# Altium PCB PCB2.PcbDoc
Units mm, origin at the board's own origin, x right, y up, seen from the top; angles counter-clockwise.
Board outline 109.8 x 62.5 mm, 2 copper layers (Top Layer, Bottom Layer); 65 components, 73 nets, 275 pads, 0 vias.
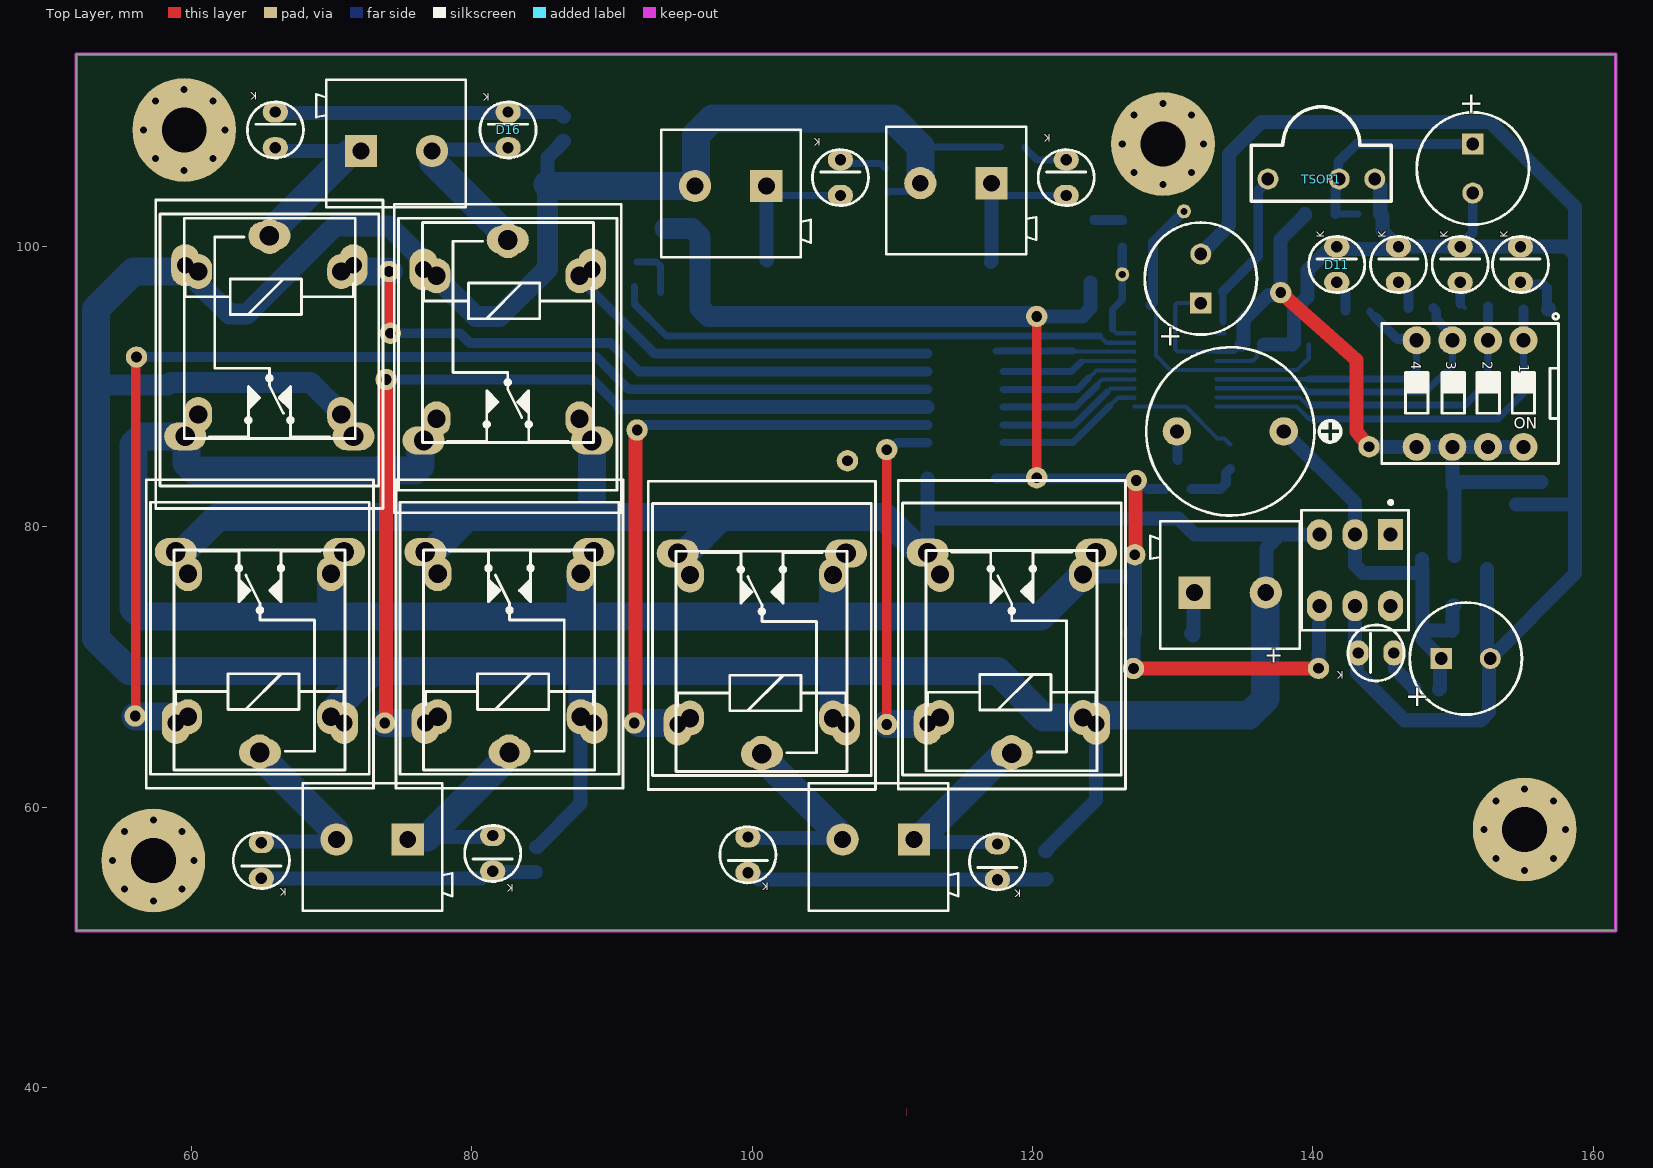
[diagram p0: Top Layer view]
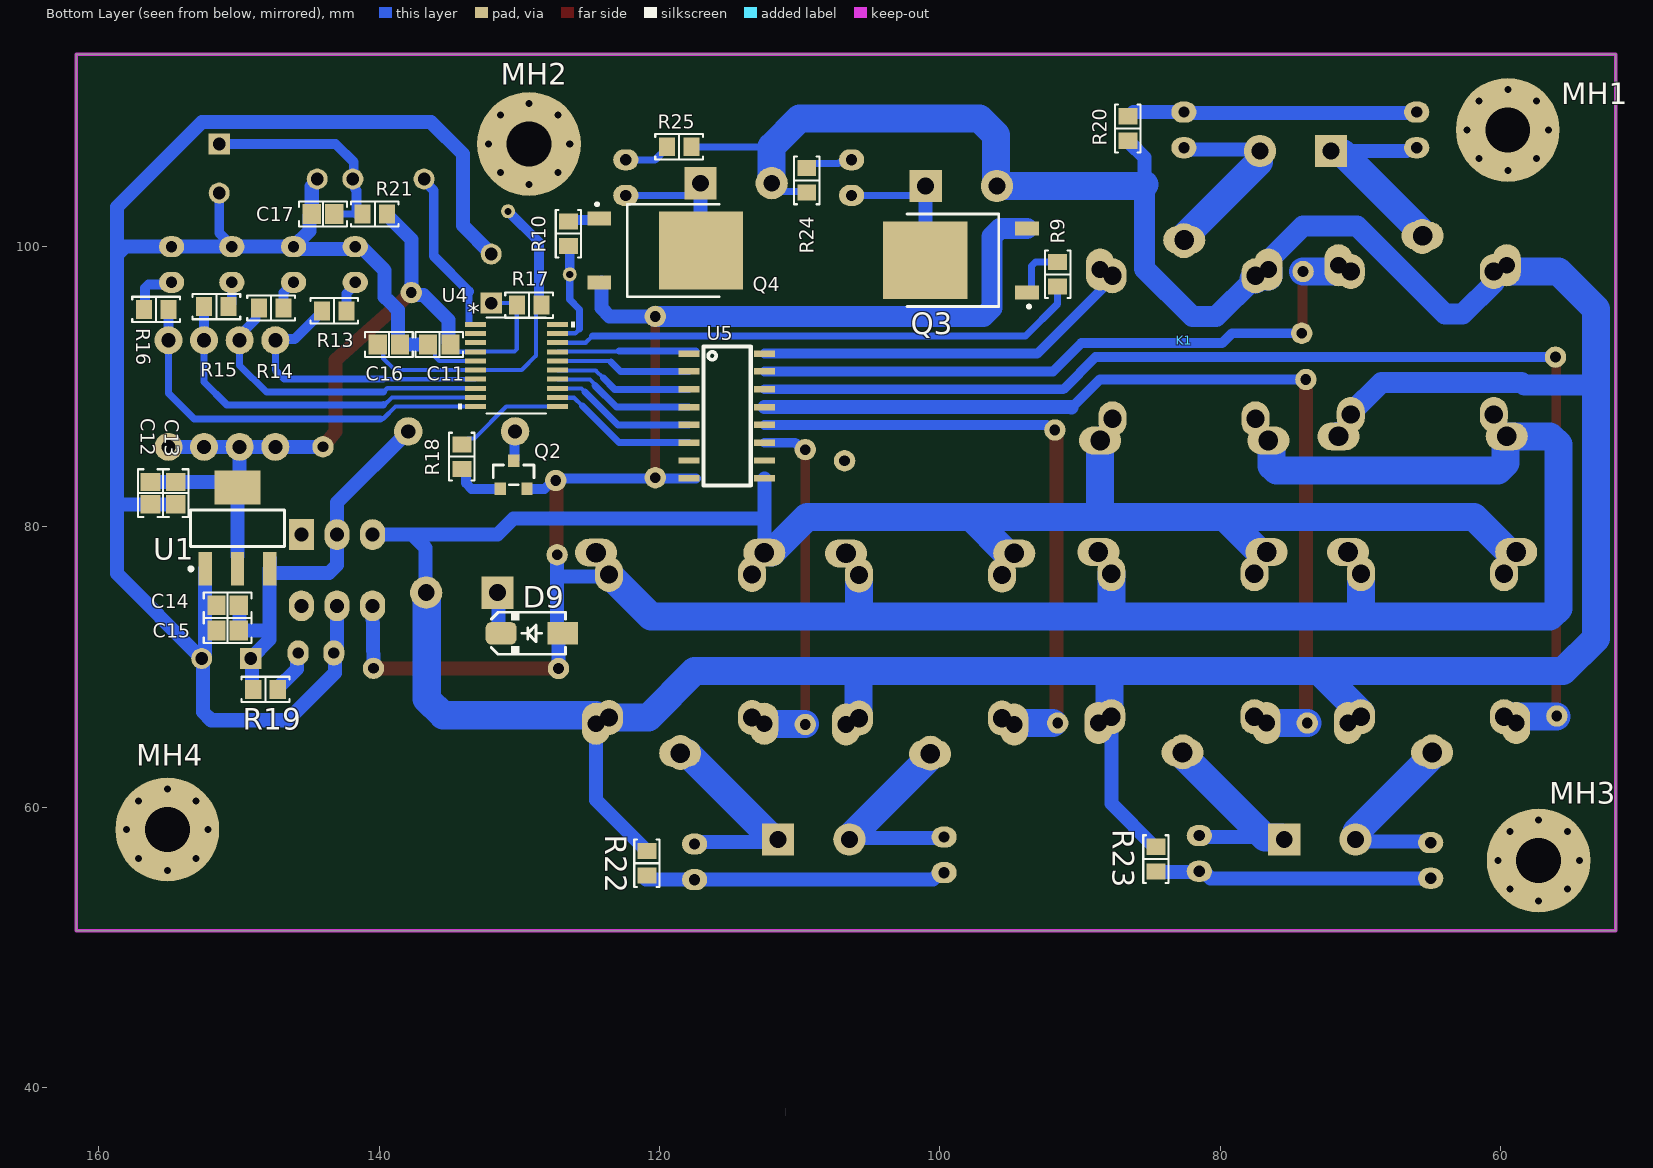
[diagram p1: Bottom Layer view, seen from below]
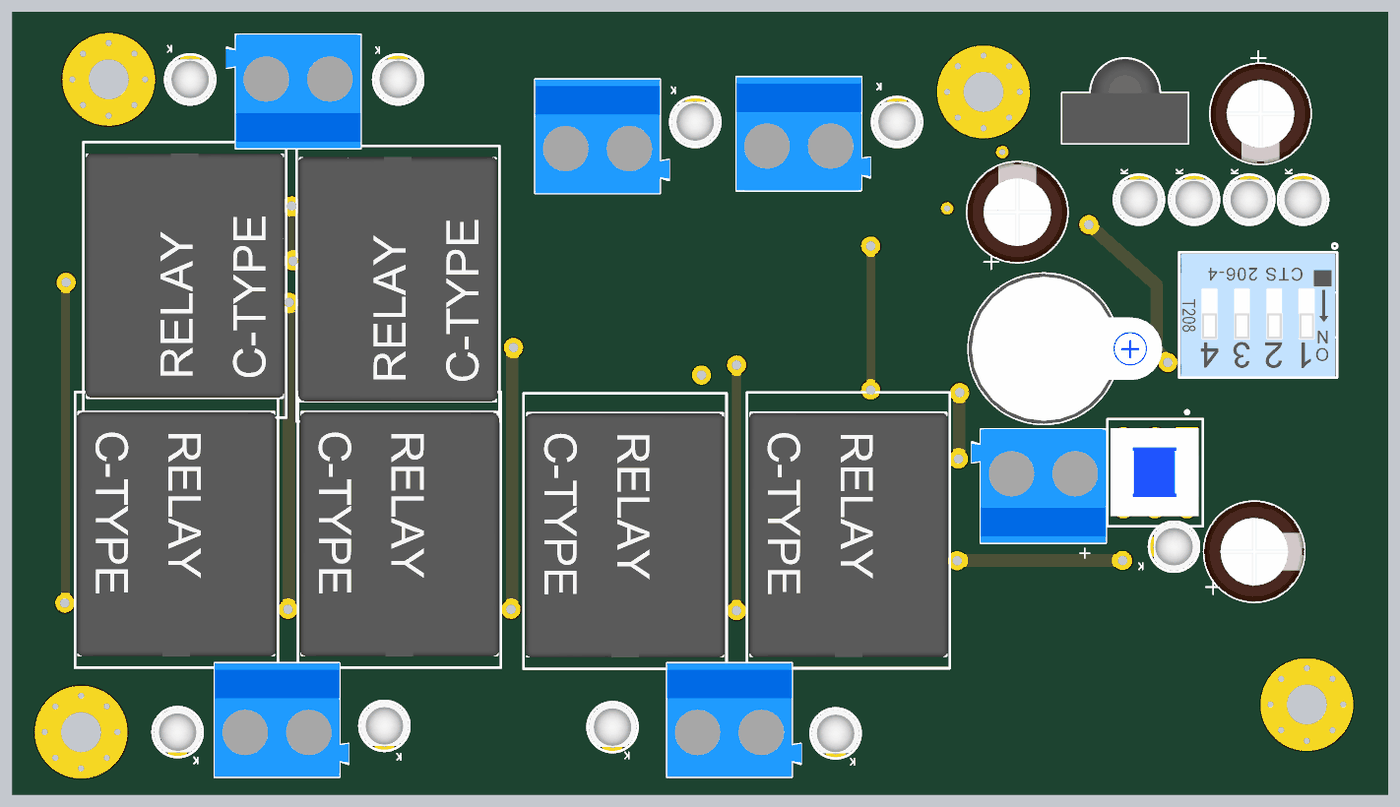
[diagram p2: 3D render of the assembled board from above, using the file's embedded part models]
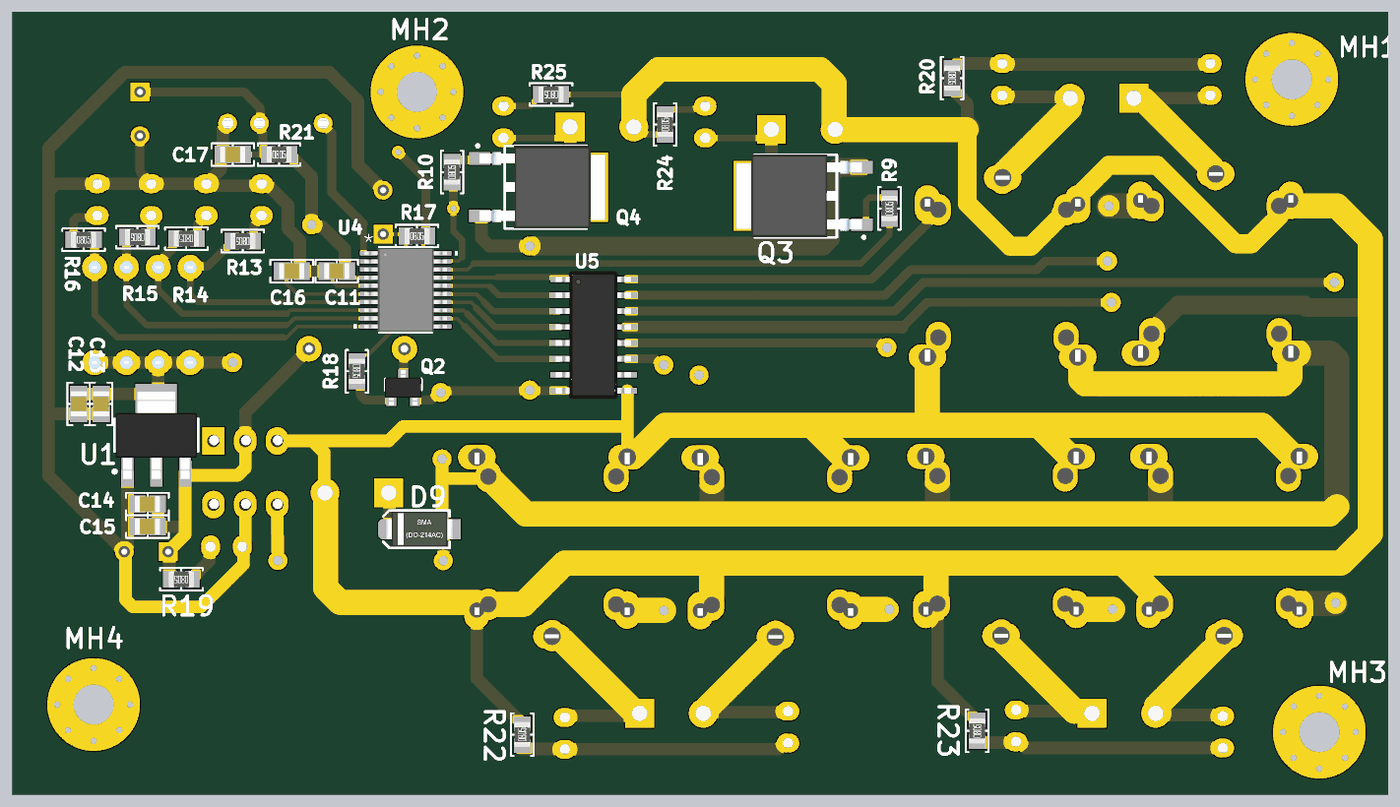
[diagram p3: 3D render of the assembled board from below, using the file's embedded part models]

## Layer stack, top to bottom
Top Solder: solder mask 0.0102, Solder Resist, Dk 3.5
Top Layer: signal copper 0.0356
Dielectric 1: dielectric 0.32, FR-4, Dk 4.8
Bottom Layer: signal copper 0.0356
Bottom Solder: solder mask 0.0102, Solder Resist, Dk 3.5

## Board outline
51.8,51.2 51.8,113.7 161.6,113.7 161.6,51.2

## Design rules (kind name [scope] priority, off if disabled: settings)
Clearance [All] p1: gap=0.3 ignorepadtopadclearanceinfootprint=TRUE except(0.7: Arc-Poly Track-Poly SMDPad-Poly THPad-Poly Via-Poly Fill-Poly Poly-Poly)
PolygonConnect [All] p1: connectstyle=Direct reliefconductorwidth=0.4 reliefentries=4 polygonreliefangle="90 Angle" airgapwidth=0.254
RoutingVias [All] p1: holewidth=0.5 width=1 viastyle="Through Hole" minholewidth=0.5 minwidth=1 maxholewidth=0.7 maxwidth=1.27
SolderMaskExpansion [All] p1: expansion=0.102 istentingtop=FALSE
Width [All] p1: maxlimit=10 minlimit=0.254 preferedwidth=0.3
30 further rules are at their usual default settings.

## Classes and differential pairs
component class Sheet2: C11 C12 C13 C14 C15 C16 C17 D9 MH1 MH2 MH3 MH4 Q2 Q3 Q4 R9 R10 R13 R14 R15 R16 R17 R18 R19 R20 R22 R23 R24 R25 U1 U4 U5

## Components (designator, comment, footprint, x,y, rotation, side; value= is the part's Value field where it differs from the comment)
C3 "Capacitor Electrical THD" Cap_3_(3.5mm) 150.902,70.6 r0 top value=1000uf
C4 "Capacitor Electrical THD" Cap_3_(3.5mm) 132.002,97.7 r90 top value=1000uf
C5 "Capacitor Electrical THD" Cap_3_(3.5mm) 151.402,105.55 r270 top value=470uf
C11 "0.1µF" "CAP 0805_2012" 135.702,93 r180 bottom
C12 "0.1µF" "CAP 0805_2012" 156.302,82.4 r90 bottom
C13 "100µF" "CAP 0805_2012" 154.502,82.4 r90 bottom
C14 "100µF" "CAP 0805_2012" 150.802,74.4 r180 bottom
C15 "0.1µF" "CAP 0805_2012" 150.802,72.6 r180 bottom
C16 "100µF" "CAP 0805_2012" 139.302,93 r0 bottom
C17 "100µF" "CAP 0805_2012" 144.002,102.3 r180 bottom
D9 "1N4007 SMD M7" D_SMA 129.102,72.4 r0 bottom value=1N4007
D11 "LED THD 3mm" "LED THD 3mm (White)" 141.702,98.7 r90 top
D12 "LED THD 3mm" "LED THD 3mm (White)" 146.102,98.7 r90 top
D13 "LED THD 3mm" "LED THD 3mm (White)" 150.502,98.7 r90 top
D14 "LED THD 3mm" "LED THD 3mm (White)" 154.802,98.7 r90 top
D15 "LED THD 3mm" "LED THD 3mm (White)" 144.502,71 r180 top
D16 "LED THD 3mm" "LED THD 3mm (White)" 82.602,108.3 r90 top
D17 "LED THD 3mm" "LED THD 3mm (White)" 99.702,56.6 r270 top
D18 "LED THD 3mm" "LED THD 3mm (White)" 117.502,56.1 r270 top
D19 "LED THD 3mm" "LED THD 3mm (White)" 66.002,108.3 r90 top
D20 "LED THD 3mm" "LED THD 3mm (White)" 65.002,56.2 r270 top
D21 "LED THD 3mm" "LED THD 3mm (White)" 81.502,56.7 r270 top
D22 "LED THD 3mm" "LED THD 3mm (White)" 106.302,104.9 r90 top
D23 "LED THD 3mm" "LED THD 3mm (White)" 122.402,104.9 r90 top
GS1 "Buzzer" BZ_SJ 134.112,86.8 r180 top locked
J2 "Socket Blue 2" "Socket Blue 2" 134.102,75.3 r0 top
J3 "Socket Blue 2" "Socket Blue 2" 74.642,106.8 r0 top
J4 "Socket Blue 2" "Socket Blue 2" 109.002,57.7 r180 top
J5 "Socket Blue 2" "Socket Blue 2" 72.902,57.7 r180 top
J6 "Socket Blue 2" "Socket Blue 2" 98.48,104.3 r180 top
J7 "Socket Blue 2" "Socket Blue 2" 114.54,104.5 r180 top
K1 "RELAY SPST 5 Pin Millon" REL_SPDT_5_2216#1 82.577,98.35 r0 bottom
K2 "RELAY SPST 5 Pin Millon" REL_SPDT_5_2216#2 100.702,65.9 r180 top
K3 "RELAY SPST 5 Pin Millon" REL_SPDT_5_2216#2 64.902,66 r180 top
K4 "RELAY SPST 5 Pin Millon" REL_SPDT_5_2216#2 65.577,98.65 r0 top
K5 "RELAY SPST 5 Pin Millon" REL_SPDT_5_2216#2 118.527,65.95 r180 top
K6 "RELAY SPST 5 Pin Millon" REL_SPDT_5_2216#2 82.702,66 r180 top
MH1 "MH_7.4mmC_3.2mmD" MH_7.4mmC_3.2mmD 59.502,108.3 r180 bottom
MH2 "MH_7.4mmC_3.2mmD" MH_7.4mmC_3.2mmD 129.302,107.3 r180 bottom
MH3 "MH_7.4mmC_3.2mmD" MH_7.4mmC_3.2mmD 57.302,56.2 r180 bottom
MH4 "MH_7.4mmC_3.2mmD" MH_7.4mmC_3.2mmD 155.102,58.4 r180 bottom
Q2 "MMBT2222A-7-F" "DIODES SOT-23-3" 130.402,83.7 r90 bottom
Q3 "PHD45N03LTA" TO228P1000X238-3N 98.502,99 r0 bottom
Q4 "PHD45N03LTA" TO228P1000X238-3N 119.602,99.7 r180 bottom
R9 "100 Ohms" "RES 0805_2012" 91.602,98 r90 bottom
R10 "100 Ohms" "RES 0805_2012" 126.502,100.9 r90 bottom
R13 "50 mOhms" "RES 0805_2012" 143.202,95.4 r0 bottom
R14 "50 mOhms" "RES 0805_2012" 147.702,95.6 r0 bottom
R15 "50 mOhms" "RES 0805_2012" 151.602,95.7 r0 bottom
R16 "50 mOhms" "RES 0805_2012" 155.902,95.5 r180 bottom
R17 "1 kOhms" "RES 0805_2012" 129.302,95.8 r180 bottom
R18 "1 kOhms" "RES 0805_2012" 134.102,85 r270 bottom
R19 "150 Ohms" "RES 0805_2012" 148.102,68.4 r0 bottom
R20 "1 kOhms" "RES 0805_2012" 86.602,108.4 r270 bottom
R21 "100 Ohms" "RES 0805_2012" 140.302,102.3 r180 bottom
R22 "1 kOhms" "RES 0805_2012" 120.902,56 r90 bottom
R23 "1 kOhms" "RES 0805_2012" 84.602,56.3 r90 bottom
R24 "1 kOhms" "RES 0805_2012" 109.502,104.7 r90 bottom
R25 "1 kOhms" "RES 0805_2012" 118.602,107.1 r0 bottom
S12 "Double Switch" SWPUST_DPDT_S2 143.002,76.9 r270 top
S13 "DIP Switch 4" "dip switch 4  Blue THD" 151.212,89.5 r270 top
TSOP1 "TSOP1138" "TSOP11XX & 13XX" 140.602,104.8 r0 top
U1 "AMS1117-3.3" SOT223-4N 150.102,79.9 r90 bottom
U4 "STM32G030F6Px" TSSOP20 130.202,91.5 r180 bottom value=Value
U5 "ULN2003AD" SOIC16 115.202,87.9 r270 bottom

## Footprints (in the part's own frame and the unit in brackets; to place one, negate y for a bottom-side part, rotate by r counter-clockwise, add the part's x,y. Pads: shape width x height; smd on the part's side, far side on the other; paste and mask are expansions set on the pad)
BZ_SJ [mil] "Buzzer From Old SJ Library"
  round 80 hole 40: 1(-150,0) 2(150,0)
  silkscreen extent -310,-236 236,236, body extent -372,-236 236,236, height 380
"CAP 0805_2012" [mm] "Chip Capacitor, 2-Leads, Body 2.00x1.20mm, IPC Medium Density"
  rect 1.3x1.4 smd: 1(-0.8,0) 2(0.8,0)
  silkscreen extent -1.7,-0.9 1.7,0.9, body extent -1,-0.64 1,0.64, height 1.26
Cap_3_(3.5mm) [mm] "Capacitor, Electrolytic, Radial; Body 8 x 5 mm (Dia.xH typ); Pin Spacing 3.5 mm (typ) (www.smartw.ir)"
  rect 1.5x1.51 hole 0.9: 1(-1.75,0)
  round 1.5 hole 0.9: 2(1.75,0)
  silkscreen extent -4,-4 4,4, body extent -4,-4 4,4, height 11
D_SMA [mm] "SMA Molded Diode, 2-Leads, Body 4.3x2.7mm, SOD-128 (www.Smartw.ir)"
  rect 2.2x1.6 smd: 1(-2.2,0)
  rrect50% 2.2x1.6 smd: 2(2.2,0)
  silkscreen extent -2.4,-1.5 2.9,1.5, body extent -2.75,-1.4 2.75,1.4, height 2.6
"DIODES SOT-23-3" [mm] "SOT23, 3-Leads, Body 2.90x2.40mm, Pitch 0.95mm, IPC Medium Density"
  rect 0.9x0.8 smd: 1(-1,0.95) 2(-1,-0.95) 3(1,0)
  silkscreen extent -0.7,-1.45 0.7,1.45, body extent -1.41,-1.45 1.41,1.45, height 1.5
"dip switch 4  Blue THD" [mm] "SWITCH DIP 4POS, THD, 2.54mm, YL04 (www.smartw.ir)"
  round 2 / inner round 1.4 / far side round 2 hole 1: 1(-3.8,3.81) 2(-3.8,1.27) 3(-3.8,-1.27) 4(-3.8,-3.81) 5(3.8,-3.81) 6(3.8,-1.27) 7(3.8,1.27) 8(3.8,3.81)
  silkscreen extent -5.7,-6.3 5,6.31, body extent -4.89,-6.17 4.89,6.17, height 8.14
"LED THD 3mm (White)" [mm] "(www.Smartw.ir)"
  oval 1.5x1.8 hole 0.8: 1(-1.27,0) 2(1.27,0)
  silkscreen extent -2,-2 2,2, body extent -1.9,-1.9 1.6,1.9, height 6.5
MH_7.4mmC_3.2mmD [mm]
  round 7.4 hole 3.2: 1(0,0)
  round 0.8 hole 0.5: 10(-2.9,0) 10(-2.051,-2.051) 10(-2.051,2.051) 10(0,-2.9) 10(0,2.9) 10(2.051,-2.051) 10(2.051,2.051) 10(2.9,0)
REL_SPDT_5_2216#1 [mm] "RELAY SPDT, OMRON G5LE SERIES, 22X16mm and 18.8x15.4mm, HJR-3FF, RAS-1215 (www.Smartw.ir)"
  oval 3x2 hole 1.4: 1(0,-2.1) 2(6,12.2) 3(-6,12.2)
  oval 2x2.5 hole 1.3: 1(0.025,-2.05) 2(5.125,10.65) 3(-5.075,10.65) 4(-5.075,0.45) 5(5.125,0.45)
  oval 2x3 hole 1.2: 4(-6,0) 5(6,0)
  body extent -7.95,-3.75 7.95,15.75, height 15.5
REL_SPDT_5_2216#2 [mm] "RELAY SPDT, OMRON G5LE SERIES, 22X16mm and 18.8x15.4mm, HJR-3FF, RAS-1215 (www.Smartw.ir)"
  oval 3x2 hole 1.4: 1(0,2.1) 2(6,-12.2) 3(-6,-12.2)
  oval 2x2.5 hole 1.3: 1(0.025,2.05) 2(5.125,-10.65) 3(-5.075,-10.65) 4(-5.075,-0.45) 5(5.125,-0.45)
  oval 2x3 hole 1.2: 4(-6,0) 5(6,0)
  silkscreen extent -8.1,-17.35 8.1,4.65, body extent -7.95,-15.75 7.95,3.75, height 15.5
"RES 0805_2012" [mm] "Chip Resistor, 2-Leads, Body 2.00x1.25mm, IPC Medium Density"
  rect 1.15x1.35 smd: 1(-0.875,0) 2(0.875,0)
  silkscreen extent -1.7,-0.9 1.7,0.9, body extent -1,-0.62 1,0.63, height 0.6
"Socket Blue 2" [mm] "(www.Smartw.ir)"
  rect 2.3x2.3 hole 1.2: 1(-2.54,0)
  round 2.3 hole 1.2: 2(2.54,0)
  silkscreen extent -5.71,-4.01 4.95,5.08, body extent -5.78,-3.99 4.96,5.08, height 12.52
SOIC16 [mm] "(www.Smartw.ir)"
  rect 0.46x1.5 smd: 1(-4.445,-2.695) 2(-3.175,-2.695) 3(-1.905,-2.695) 4(-0.635,-2.695) 5(0.635,-2.695) 6(1.905,-2.695) 7(3.175,-2.695) 8(4.445,-2.695) 9(4.445,2.695) 10(3.175,2.695) 11(1.905,2.695) 12(0.635,2.695) 13(-0.635,2.695) 14(-1.905,2.695) 15(-3.175,2.695) 16(-4.445,2.695)
  silkscreen extent -4.95,-1.65 4.95,1.7, body extent -5.09,-3.03 5.11,2.97, height 1.7
SOT223-4N [mm] "SOT223, 4-Leads, Body 6.7x7.3mm (max), Pitch 2.30mm, IPC Medium Density"
  rect 2.4x0.95 smd: 1(-2.9,2.3) 2(-2.9,0) 3(-2.9,-2.3)
  rect 2.4x3.3 smd: 4(2.9,0)
  silkscreen extent -3.02,-3.35 1.3,3.45, body extent -3.48,-3.25 3.48,3.25, height 1.68
SWPUST_DPDT_S2 [mm] "Switch, Push, DPDT, THD, Straight (www.Smartw.ir)"
  rect 2.2x1.8 hole 1: 1(-2.54,2.54)
  oval 2.2x1.8 hole 1: 2(-2.54,0) 3(-2.54,-2.54) 4(2.54,-2.54) 5(2.54,0) 6(2.54,2.54)
  silkscreen extent -4.96,-3.81 4.28,3.81, body extent -3.55,-3.55 3.45,3.45, height 14
TO228P1000X238-3N [mm]
  rect 1.7x1 smd: 1(-4.7,2.285) 3(-4.7,-2.285)
  rect 6x5.55 smd paste-4: 4(2.55,0)
  silkscreen extent -4.96,-3.3 3.85,3.41, body extent -4.7,-3.3 5.3,3.3, height 2.38
"TSOP11XX & 13XX" [mm] "(www.Smartw.ir)"
  round 1.5 hole 0.9: 1(3.81,0) 2(1.27,0) 3(-3.81,0)
  silkscreen extent -5,-1.6 5,5.15, body extent -5,-1.6 5,5.15, height 14.25
TSSOP20 [mil] "STM32 package, TSSOP20, 6.4 x 4.4mm"
  rect 58x14 smd: 1(-115,115.16) 2(-115,89.57) 3(-115,63.98) 4(-115,38.39) 5(-115,12.8) 6(-115,-12.8) 7(-115,-38.39) 8(-115,-63.98) 9(-115,-89.57) 10(-115,-115.16) 11(115,-115.16) 12(115,-89.57) 13(115,-63.98) 14(115,-38.39) 15(115,-12.8) 16(115,12.8) 17(115,38.39) 18(115,63.98) 19(115,89.57) 20(115,115.16)
  silkscreen extent -164,-135 164,135, body extent -130,-130 130,130, height 47

## Part data
C11 C12 C15: library part AC0805KKX8R9BB104, "CAP CER 0805 10% X8R 50V 100NF", Device Package="0805 (2012 Metric)", Manufacturer=Yageo, Operating Temperature="-55°C ~ 150°C", Ratings=AEC-Q200, Supplier Part Number 1=311-4624-1-ND, Temperature Coefficient=X8R, Tolerance=±10%, Voltage - Rated=50V, Applications=Automotive, Capacitance=0.1µF, ComponentLink1Description=Datasheet, ComponentLink1URL=http://www.yageo.com/documents/recent/AC0805KKX8R9BB104.pdf, ComponentLink2Description="DigiKey Link", ComponentLink2URL=http://digikey.com/product-detail/en/yageo/AC0805KKX8R9BB104/311-4624-1-ND/9699550, LastUpdated="2020-09-02 01:04:19.917000", Lifecycle Status=Active, Minimum Order=1, Mounting Type="Surface Mount, MLCC", Package / Case="0805 (2012 Metric)", Packaging=TapeAndReel, Part Number=AC0805KKX8R9BB104, Part Status=Active, PartId=14076, Price=0.06, Series=AC, Size / Dimension="0.079 L x 0.049 W (2.00mm x 1.25mm)", Supplier 1=DigiKey, Thickness (Max)="0.057 (1.45mm)"
C13 C14 C16 C17: library part GRM21BR60J107ME15L, "CAP CER 100UF 6.3V X5R 0805", Device Package="0805 (2012 Metric)", Manufacturer="Murata Electronics", Operating Temperature="-55°C ~ 85°C", Supplier Part Number 1=490-13981-1-ND, Temperature Coefficient=X5R, Tolerance=±20%, Voltage - Rated=6.3V, Applications="General Purpose", Capacitance=100µF, ComponentLink1Description=Datasheet, ComponentLink1URL=https://search.murata.co.jp/Ceramy/image/img/A01X/G101/ENG/GRM21BR60J107ME15-01.pdf, ComponentLink2Description="DigiKey Link", ComponentLink2URL=http://digikey.com/product-detail/en/murata-electronics/GRM21BR60J107ME15L/490-13981-1-ND/6155811, LastUpdated="2020-09-02 01:04:10.617000", Lifecycle Status=Active, Minimum Order=1, Mounting Type="Surface Mount, MLCC", Package / Case="0805 (2012 Metric)", Packaging=TapeAndReel, Part Number=GRM21BR60J107ME15L, Part Status=Active, PartId=16995, Price=0.61, Series=GRM, Size / Dimension="0.079 L x 0.049 W (2.00mm x 1.25mm)", Supplier 1=DigiKey, Thickness (Max)="0.057 (1.45mm)"
D9: "DIODE, GENERAL PURPOSE, 1000V/1A", ComponentLink1Description="Website Smart World", ComponentLink1URL=https://www.smartw.ir/, ComponentLink2Description=Telegram, ComponentLink2URL=https://t.me/altium_smartw, ComponentLink3Description=Instagram, ComponentLink3URL=https://Instagram.com/smartgw.ir, DatasheetVersion=2021
GS1: "Magnetic Transducer Buzzer", Category=MISC, Company="SJ Libraries", ComponentLink1Description=Datasheet, ComponentLink2Description=Reference, Designer="Eng. Saeid Jorablo", HelpURL=http://s3.picofile.com/file/7443264187/Coming_Soon_logo.gif, Mounting Technology="Surface Mount\Through-Hole", PackageDescription="Magnetic Transducer Buzzer", PackageReference=ABSM-1574, Pin Count=0, Publisher="SJ Unlimited", Status=Unreleased
K1 K2 K3 K4 K5 K6: "Relay", ComponentLink1Description="Website Smart World", ComponentLink1URL=https://www.smartw.ir/, ComponentLink2Description=Telegram, ComponentLink2URL=https://t.me/altium_smartw, ComponentLink3Description=Instagram, ComponentLink3URL=https://Instagram.com/smartgw.ir, ComponentLinkp-URL=https://www.smartw.ir/, DatasheetVersion=2021
MH1 MH2 MH3 MH4: "MH_7.4MM Diameter,3.2mm Drill"
Q2: "TRANS NPN 40V 0.6A SMD SOT23-3", Current - Collector (Ic) (Max)=600mA, Current - Collector Cutoff (Max)="10nA (ICBO)", DC Current Gain (hFE) (Min) @ Ic, Vce="100 @ 150mA, 10V", Frequency - Transition=300MHz, Manufacturer="Diodes Incorporated", Operating Temperature="-55°C ~ 150°C (TJ)", Package / Case="TO-236-3, SC-59, SOT-23-3", Power - Max=310mW, Supplier Device Package=SOT-23-3, Supplier Part Number 1=MMBT2222A-FDICT-ND, Voltage - Collector Emitter Breakdown (Max)=40V, ComponentLink1Description=Datasheet, ComponentLink1URL=https://www.diodes.com/assets/Datasheets/ds30041.pdf, ComponentLink2Description="DigiKey Link", ComponentLink2URL=http://digikey.com/product-detail/en/diodes-incorporated/MMBT2222A-7-F/MMBT2222A-FDICT-ND/815723, LastUpdated="2020-09-02 01:30:06.317000", Lifecycle Status=Active, Minimum Order=1, Mounting Type="Surface Mount", Packaging=TapeAndReel, Part Number=MMBT2222A-7-F, Part Status=Active, PartId=84, Price=0.02, Series="Automotive, AEC-Q101", Supplier 1=DigiKey, Transistor Type=NPN, Vce Saturation (Max) @ Ib, Ic="1V @ 50mA, 500mA"
Q3 Q4: "Bipolar Transistors - BJT", Package="TO-252-3 NXP USA", Availability=Unavailable, MF="NXP USA", MP=PHD45N03LTA, Price=None, SnapEDA_Link=https://www.snapeda.com/parts/PHD45N03LTA/NXP%20USA%20Inc./view-part/554376/?ref=snap
R9 R10: library part RCS0805100RFKEA, "RES SMD 100 OHM 1% 0.4W 0805", Device Package="0805 (2012 Metric)", Manufacturer="Vishay Dale", Operating Temperature="-55°C ~ 155°C", Power (Watts)="0.4W, 2/5W", Ratings=AEC-Q200, Supplier Device Package=0805, Supplier Part Number 1=541-2834-1-ND, Temperature Coefficient=±100ppm/°C, Tolerance=±1%, ComponentLink1Description=Datasheet, ComponentLink1URL=http://www.vishay.com/docs/20065/rcse3.pdf, ComponentLink2Description="DigiKey Link", ComponentLink2URL=http://digikey.com/product-detail/en/vishay-dale/RCS0805100RFKEA/541-2834-1-ND/5867127, Composition="Thick Film", Features="Automotive AEC-Q200, Pulse Withstanding", Height - Seated (Max)="0.020 (0.50mm)", LastUpdated="2020-09-02 01:15:23.790000", Lifecycle Status=Active, Minimum Order=1, Number of Terminations=2, Package / Case="0805 (2012 Metric)", Packaging=TapeAndReel, Part Number=RCS0805100RFKEA, Part Status=Active, PartId=27784, Price=0.03, Resistance="100 Ohms", Series="RCS e3", Size / Dimension="0.079 L x 0.049 W (2.00mm x 1.25mm)", Supplier 1=DigiKey
R13 R14 R15 R16: library part CRM0805-FW-R050ELF, "RES 0.05 OHM 1% 1/4W 0805", Device Package="0805 (2012 Metric)", Manufacturer="Bourns Inc.", Operating Temperature="-55°C ~ 155°C", Power (Watts)="0.25W, 1/4W", Supplier Device Package=0805, Supplier Part Number 1=CRM0805-FW-R050ELFCT-ND, Temperature Coefficient=±200ppm/°C, Tolerance=±1%, ComponentLink1Description=Datasheet, ComponentLink1URL=https://www.bourns.com/docs/Product-Datasheets/CRM0805_1206_2010.pdf, ComponentLink2Description="DigiKey Link", ComponentLink2URL=http://digikey.com/product-detail/en/bourns-inc/CRM0805-FW-R050ELF/CRM0805-FW-R050ELFCT-ND/3592903, Composition="Thick Film", Features="Current Sense", Height - Seated (Max)="0.024 (0.60mm)", LastUpdated="2020-09-02 01:15:22.390000", Lifecycle Status=Active, Minimum Order=1, Number of Terminations=2, Package / Case="0805 (2012 Metric)", Packaging=TapeAndReel, Part Number=CRM0805-FW-R050ELF, Part Status=Active, PartId=28469, Price=0.14, Resistance="50 mOhms", Series=CRM0805, Size / Dimension="0.079 L x 0.047 W (2.00mm x 1.20mm)", Supplier 1=DigiKey
R17 R18 R20 R22 R23 R24 R25: library part RNCP0805FTD1K00, "RES 1K OHM 1% 1/4W 0805", Device Package="0805 (2012 Metric)", Manufacturer="Stackpole Electronics Inc", Operating Temperature="-55°C ~ 155°C", Power (Watts)="0.25W, 1/4W", Supplier Device Package=0805, Supplier Part Number 1=RNCP0805FTD1K00CT-ND, Temperature Coefficient=±100ppm/°C, Tolerance=±1%, ComponentLink1Description=Datasheet, ComponentLink1URL=https://www.seielect.com/catalog/sei-rncp.pdf, ComponentLink2Description="DigiKey Link", ComponentLink2URL=http://digikey.com/product-detail/en/stackpole-electronics-inc/RNCP0805FTD1K00/RNCP0805FTD1K00CT-ND/2240568, Composition="Thin Film", Features="Anti-Sulfur, Moisture Resistant", Height - Seated (Max)="0.024 (0.60mm)", LastUpdated="2020-09-02 01:15:23.347000", Lifecycle Status=Active, Minimum Order=1, Number of Terminations=2, Package / Case="0805 (2012 Metric)", Packaging=TapeAndReel, Part Number=RNCP0805FTD1K00, Part Status=Active, PartId=28023, Price=0.01, Resistance="1 kOhms", Series=RNCP, Size / Dimension="0.079 L x 0.049 W (2.00mm x 1.25mm)", Supplier 1=DigiKey
R19: library part CRGP0805F150R, "CRGP 0805 150R 1%", Device Package="0805 (2012 Metric)", Manufacturer="TE Connectivity Passive Product", Operating Temperature="-55°C ~ 155°C", Power (Watts)="0.333W, 1/3W", Supplier Device Package=0805, Supplier Part Number 1=A130467CT-ND, Temperature Coefficient=±100ppm/°C, Tolerance=±1%, ComponentLink1Description=Datasheet, ComponentLink1URL=https://www.te.com/commerce/DocumentDelivery/DDEController?Action=srchrtrv&DocNm=9-1773463-9&DocType=DS&DocLang=English, ComponentLink2Description="DigiKey Link", ComponentLink2URL=http://digikey.com/product-detail/en/te-connectivity-passive-product/CRGP0805F150R/A130467CT-ND/8578299, Composition="Thick Film", Features="Pulse Withstanding", Height - Seated (Max)="0.026 (0.65mm)", LastUpdated="2020-09-02 01:15:21.910000", Lifecycle Status=Active, Minimum Order=1, Number of Terminations=2, Package / Case="0805 (2012 Metric)", Packaging=TapeAndReel, Part Number=CRGP0805F150R, Part Status=Active, PartId=28713, Price=0.02, Resistance="150 Ohms", Series=CRGP, Size / Dimension="0.079 L x 0.049 W (2.00mm x 1.25mm)", Supplier 1=DigiKey
R21: library part CRGP0805F100R, "CRGP 0805 100R 1%", Device Package="0805 (2012 Metric)", Manufacturer="TE Connectivity Passive Product", Operating Temperature="-55°C ~ 155°C", Power (Watts)="0.333W, 1/3W", Supplier Device Package=0805, Supplier Part Number 1=A130465CT-ND, Temperature Coefficient=±200ppm/°C, Tolerance=±1%, ComponentLink1Description=Datasheet, ComponentLink1URL=https://www.te.com/commerce/DocumentDelivery/DDEController?Action=srchrtrv&DocNm=9-1773463-9&DocType=DS&DocLang=English, ComponentLink2Description="DigiKey Link", ComponentLink2URL=http://digikey.com/product-detail/en/te-connectivity-passive-product/CRGP0805F100R/A130465CT-ND/8578297, Composition="Thick Film", Features="Pulse Withstanding", Height - Seated (Max)="0.026 (0.65mm)", LastUpdated="2020-09-02 01:14:53.183000", Lifecycle Status=Active, Minimum Order=1, Number of Terminations=2, Package / Case="0805 (2012 Metric)", Packaging=TapeAndReel, Part Number=CRGP0805F100R, Part Status=Active, PartId=41705, Price=0.02, Resistance="100 Ohms", Series=CRGP, Size / Dimension="0.079 L x 0.049 W (2.00mm x 1.25mm)", Supplier 1=DigiKey
S12: library part "SW DPDT", "DPDT Switch", ComponentLink1Description="Website Smart World", ComponentLink1URL=https://www.smartw.ir/, ComponentLink2Description=Telegram, ComponentLink2URL=https://t.me/altium_smartw, ComponentLink3Description=Instagram, ComponentLink3URL=https://Instagram.com/smartgw.ir, DatasheetVersion=2021
S13: "4 BIT DIP Switch", ComponentLink1Description="Website Smart World", ComponentLink1URL=https://www.smartw.ir/, ComponentLink2Description=Telegram, ComponentLink2URL=https://t.me/altium_smartw, ComponentLink3Description=Instagram, ComponentLink3URL=https://Instagram.com/smartgw.ir, DatasheetVersion=2021
TSOP1: "IR Receiver Modules for Remote Control Systems", ComponentLink1Description="Website Smart World", ComponentLink1URL=https://www.smartw.ir/, ComponentLink2Description=Telegram, ComponentLink2URL=https://t.me/altium_smartw, ComponentLink3Description=Instagram, ComponentLink3URL=https://Instagram.com/smartgw.ir, ComponentLinkp-URL=https://www.smartw.ir/, DatasheetVersion=2021
U1: library part CMP-209535-000001-1, "LDO Voltage Regulators 1A, 3.3V", Dropout Voltage=1.1V, Manufacturer="Advanced Monolithic Systems", Max Junction Temp=+125°C, Max Power Dissipation=1.2W, Max Supply Voltage=15V, Nominal Supply Current=5mA, Output Current=1A, Output Voltage=3.3V, Package=AMS1117, Temperature="-40°C to +125°C", Temperature Range Low=-40°C, Automotive=No, Category=IC, ComponentLink2Description=Datasheet, ComponentLink2URL=http://www.advanced-monolithic.com/pdf/ds1117.pdf, Device Class L1="Integrated Circuits (ICs)", Device Class L2="Power Management ICs", Device Class L3="Voltage Regulators - Linear", Height=1.8mm, Ipc Land Pattern Name=SOT229P700X180-4, Lead Free=Yes, Manufacturer Part Number=AMS1117-3.3, Number Of Outputs=1, Octopart=https://octopart.com/ams1117-3.3-advanced+monolithic+systems-25899300, Output Type=Fixed, RoHS=TRUE, Standoff Height=0.64mm, Temperature Range High=+125°C
U4: "The STM32G030x6/x8 mainstream microcontrollers are based on high-performance Arm® Cortex®-M0+ 32-bit RISC core operating at up to 64 MHz frequency.  / 32K Flash and 8K RAM with 20pin TSSOP 6.4x4.4mm package", Manufacturer_Part_Number=stm32g0_tssop20_t1, Copyright="Copyright (C) 2018 Accelerated Designs. All rights reserved", RefDes=RefDes, TYPE=DEV, Vendor=STMicroelectronics
U5: "Darlington Transistor Array", Code_IPC=SOIC127P600-16, ComponentLink1Description="Manufacturer Link", ComponentLink1URL=http://www.ti.com/, ComponentLink2Description=Datasheet, ComponentLink2URL=http://www-s.ti.com/sc/ds/uln2002a.pdf, DatasheetVersion=Sep-1986, LatestRevisionDate=13-Apr-2006, LatestRevisionNote="IPC-7351 Footprint Added.", PackageDescription="16-Pin Small Outline Integrated Circuit 1.27 mm Pitch", PackageReference=D016, PackageVersion=Jan-1998, Published=15-May-2002, Publisher="Altium Limited"
C3 C4 C5 D11 D12 D13 D14 D15 D16 D17 D18 D19 D20 D21 D22 D23: ComponentLink1Description="Website Smart World", ComponentLink1URL=https://www.smartw.ir/, ComponentLink2Description=Telegram, ComponentLink2URL=https://t.me/altium_smartw, ComponentLink3Description=Instagram, ComponentLink3URL=https://Instagram.com/smartgw.ir, DatasheetVersion=2021
J2 J3 J4 J5 J6 J7: ComponentLink1Description="Website Smart World", ComponentLink1URL=https://www.smartw.ir/*, ComponentLink2Description=Telegram, ComponentLink2URL=https://t.me/altium_smartw, ComponentLink3Description=Instagram, ComponentLink3URL=https://Instagram.com/smartgw.ir, DatasheetVersion=2021

## Free pads (board coordinates)
  round 1.524 hole 0.762: 2(127.302,78) 3(120.302,83.5) 4(144.002,85.7) 5(137.702,96.7) 9(109.602,65.9) 10(109.602,85.5) 11(91.802,86.9) 13(91.602,66) 14(73.802,66) 15(56.102,92.1) 16(56.002,66.5) 17(73.902,90.5) 18(74.2,93.8) 19(74.102,98.2) 20(120.302,95) 21(127.402,83.3) 22(106.802,84.7) 24(127.202,69.886) 25(140.402,69.9)
  round 1 hole 0.5: 6(126.402,98) 8(130.802,102.5)

## Nets (pads, with @x,y where several pads share a name; then routed paths per layer and width w, separated by ;. In a path a pad name is that pad's centre, name@x,y a point inside that pad or via, vN(x,y) a via of type N, cw(c..) or ccw(c..) an arc to the next point about the centre after c; other vN are vias at no path point)
+Power: J2.2 J6.2 J7.2 K1.2 K1.4 K2.2 K2.4 K3.2 K3.4 K4.2 K4.4 K5.2 K5.4 K6.2 K6.4 R20.2 R22.2 R23.2 R24.1 R25.1 S12.3 U5.9 | length 370.1
  Bottom Layer w0.5: R24.1@109.702,103.825 109.777,103.9 111.553,103.9 J7.2@112.153,104.5 ; 111.902,107.1 112,107.1 R25.1
  Bottom Layer w1: K3.2@58.902,78.2 K3.2@59.402,78.2 ; K3.4@69.977,66.45 K3.4@69.977,66.7 ; K4.2@71.677,86.95 K4.2@71.702,86.975 ; K6.2@76.702,78.2 K6.2@77.202,78.2 ; R23.2 84.702,57.175 87.777,60.25 87.777,66.45 87.777,66.7 K6.4@87.902,66.825 ; 85.4,104.4 85.4,106.323 86.427,107.35 86.427,107.45 86.502,107.525 R20.2 ; K1.2@87.702,87.45 87.702,87.7 K1.2@87.702,87.95 ; 88.502,80.7 88.577,80.775 ; K2.2@94.702,78.1 K2.2@95.202,78.1 ; K2.4@105.777,66.35 K2.4@105.802,66.375 ; K5.2@112.027,78.15 112.527,78.15 112.517,78.16 112.517,80.6 ; U5.9 112.517,83.445 112.517,80.6 ; R22.2 121.002,56.875 121.077,56.95 121.077,57.05 124.527,60.5 K5.4@124.527,65.95 ; K5.4@123.602,66.4 K5.4@123.602,66.557 ; J2.2@136.602,75.26 136.702,75.36 136.702,78.5 137.642,79.44 ; S12.3 137.642,79.44 ; 112.517,80.6 130.402,80.6 131.562,79.44 137.642,79.44
  Bottom Layer w1.5: 53.227,90.1 58.327,90.1 58.527,90.3 68.516,90.3 70.702,88.115 K4.2@70.702,88 ; K4.4@60.502,97.95 60.502,97.4 62.729,95.172 63.972,95.172 70.25,101.45 74.104,101.45 K1.4@76.402,99.153 ; K1.4@77.65,97.65 80.322,94.978 81.978,94.978 85.4,98.4 85.4,104.4
  Bottom Layer w2: K3.2@59.402,78.2 61.902,80.7 79.702,80.7 ; K4.4@60.502,98.2 59.577,98.2 55.9,98.2 53.227,95.527 53.227,90.1 53.227,72.046 55.573,69.7 72.977,69.7 ; K3.4@69.977,66.7 72.977,69.7 ; K1.4@76.577,97.9 76.577,98.35 76.577,97.85 77.45,97.85 K1.4@77.471,97.829 ; K6.2@77.202,78.2 79.702,80.7 ; K1.4@77.502,97.829 77.502,97.65 K1.4@77.65,97.65 ; 85.4,104.4 85.5,104.3 J6.2 ; K6.4@87.902,66.825 87.902,69.5 ; 88.577,80.775 K1.2@88.577,86.15 ; K2.2@95.202,78.1 97.802,80.7 ; J6.2@95.997,104.439 95.997,104.57 96.002,104.574 96.002,107.928 97.173,109.1 110,109.1 112,107.1 J7.2 ; K2.4@105.802,66.375 105.802,69.545 ; K5.2@112.027,78.15 109.477,80.7 97.802,80.7 ; K5.4@124.323,66.4 123.602,66.4 120.802,66.4 117.502,69.7 105.802,69.7 87.902,69.7 72.977,69.7 ; K5.4@124.527,66.557 135.43,66.557 136.602,67.728 J2.2@136.602,75.26 ; 79.702,80.7 88.502,80.7 97.802,80.7
+VBAT: C3.1 C14.2 C15.2 GS1.1 R19.2 S12.2 U1.3 | length 30.6
  Bottom Layer w1: GS1.1 137.922,86.794 143.002,81.714 S12.2 143.002,77.286 143.587,76.7 147.777,76.7 U1.3@147.802,76.725 ; U1.3@147.777,77.7 147.777,77.025 U1.3 U1.3@147.802,76.725 ; R19.2 149.052,68.475 149.052,70.5 C3.1 149.152,70.605 147.802,71.955 147.802,72.6 ; C15.2@149.902,72.65 149.902,72.6 147.802,72.6 ; C15.2@149.927,72.575 149.952,72.6 C14.2@149.952,74.35 ; C14.2@150.052,74.35 C14.2@150.102,74.4 ; 147.802,72.6 U1.3@147.802,76.725
-Power: D9.1 K1.3 K2.3 K3.3 K4.3 K5.3 K6.3 pad.2 pad.3 pad.20 pad.21 pad.24 pad.25 Q2.2 Q3.3 Q4.3 S12.4 U5.8 | length 214.5
  Top Layer w0.7: pad.3 pad.20
  Top Layer w1: pad.24 127.209,69.893 140.394,69.893 pad.25 ; pad.2 127.352,78.05 127.352,83.25 pad.21
  Bottom Layer w0.7: U5.8@117.402,83.442 pad.3@119.834,83.442 ; pad.3@120.244,83.852 pad.3@119.834,83.442 ; pad.21 127.592,83.3 128.192,82.7 Q2.2 ; pad.21@127.602,83.4 127.559,83.442 pad.3@119.834,83.442
  Bottom Layer w1: K4.3@59.806,86.45 60.268,86.912 60.268,87.246 60.502,87.479 K4.3@60.502,88 ; K1.3@76.341,85.914 K1.3@76.577,86.15 ; pad.20 123.564,95 124.15,95.586 Q4.3@124.15,97.415 ; K5.3@123.602,76.6 123.752,76.45 127.302,76.45 ; D9.1 127.202,72.1 pad.24 ; D9.1@127.302,72.4 127.302,76.45 ; pad.2 127.302,76.45 ; pad.25 S12.4
  Bottom Layer w1.5: Q3.3 95.716,101.285 96.302,100.699 96.302,95.586 96.887,95 pad.20
  Bottom Layer w2: K4.3@59.652,86.375 59.652,84.536 60.187,84 75.991,84 76.341,84.35 K1.3@76.341,85.914 ; K4.3@59.806,86.45 56.486,86.45 55.9,85.864 55.9,74.186 56.486,73.6 70.3,73.6 ; K3.3@69.977,76.65 69.977,73.923 70.3,73.6 ; K6.3@87.777,76.65 87.777,73.677 87.7,73.6 ; K2.3@105.777,76.55 105.777,73.623 105.8,73.6 ; K5.3@123.602,76.6 120.602,73.6 105.8,73.6 ; 70.3,73.6 87.7,73.6 ; 87.7,73.6 105.8,73.6
A: 
add_0: R13.2 S13.4 U4.7 | length 20.9
  Bottom Layer w0.3: U4.7 139.677,90.525
  Bottom Layer w0.5: 139.677,90.525 146.764,90.525 147.402,91.163 S13.4 S13.4@147.316,93.386 ; R13.2 144.077,95.3 144.402,94.975 R13.2@144.424,94.975
  Bottom Layer w0.7: R13.2@144.424,94.975 146.013,93.386 S13.4@147.316,93.386
add_1: R14.2 S13.3 U4.8 | length 22.4
  Bottom Layer w0.3: U4.8 139.417,89.875 139.692,89.6
  Bottom Layer w0.5: 139.692,89.6 148.032,89.6 149.942,91.51 S13.3
  Bottom Layer w0.7: R14.2 148.802,95.375 148.802,94.792 149.942,93.652 S13.3
add_2: R15.2 S13.2 U4.9 | length 25.6
  Bottom Layer w0.3: U4.9 139.077,89.225 139.594,88.707 139.684,88.707
  Bottom Layer w0.5: 139.684,88.707 139.692,88.7 150.864,88.7 152.482,90.318 S13.2 S13.2@152.479,93.303 ; R15.2 R15.2@152.479,95.697
  Bottom Layer w0.7: S13.2@152.479,93.303 R15.2@152.479,95.697
add_3: R16.2 S13.1 U4.10 | length 29
  Bottom Layer w0.3: U4.10 138.827,88.575 139.702,87.7 139.902,87.7
  Bottom Layer w0.5: 139.902,87.7 153.212,87.7 155.002,89.49 155.002,93.28 S13.1 S13.1@155.024,93.302 ; R16.2@155.024,95.498 R16.2
  Bottom Layer w0.7: S13.1@155.024,93.302 R16.2@155.024,95.498
B_1: 
B_2: 
B_3: 
B_4: 
Buzzer: 
D: 
GND: C3.2 C4.2 C5.2 C11.1 C12.1 C13.1 C14.1 C15.1 C16.1 C17.1 D11.2 D12.2 D13.2 D14.2 D15.2 S12.5 TSOP1.1 U1.1 U4.5 | length 142.8
  Bottom Layer w0.3: U4.5 135.713,91.825 136.002,92.114 136.002,92.5 C11.1@136.252,92.75
  Bottom Layer w0.5: C11.1@136.252,92.75 C11.1 ; D11.2@141.281,99.97 D11.2 ; D12.2@146.952,99.97 147.102,99.97
  Bottom Layer w0.7: D13.2 150.502,100.036 151.402,100.936 C5.2
  Bottom Layer w1: C4.2 134.021,101.47 134.021,106.57 136.302,108.85 ; 136.302,108.87 152.628,108.87 158.702,102.796 158.702,99.384 ; C11.1 C16.1@138.102,93 ; C16.1 138.652,93.15 138.652,95.441 139.264,96.053 139.264,96.062 139.602,96.4 139.602,98.291 D11.2@141.281,99.97 ; D11.2@141.702,99.9 141.782,99.82 146.207,99.82 146.287,99.74 146.517,99.97 147.102,99.97 D13.2 D14.2 158.116,99.97 158.702,99.384 ; S12.5 143.002,71 143.149,70.852 143.149,69.586 146.535,66.2 151.97,66.2 152.556,66.786 152.556,70.504 C3.2 ; TSOP1.1 144.412,104.665 144.802,104.275 C17.1 144.952,102.15 144.952,101.105 D12.2@146.087,99.97 ; D12.2@146.052,100.02 D12.2 ; U1.1 152.402,70.985 152.652,70.735 C3.2 ; C13.1 C12.1 158.702,81.6 ; C3.2 158.702,76.65 158.702,81.6 ; 158.702,81.6 158.702,99.384
IR_LED: 
motor_1__A_relay: K1.5 U5.16 | length 27.2
  Bottom Layer w0.7: K1.5@87.702,97.9 87.95,97.651 87.95,97.451 93.057,92.345 U5.16
motor_1__B_relay: K4.5 pad.18 pad.19 U5.15 | length 47.3
  Top Layer w0.7: pad.19 74.152,98.15 74.152,93.95 pad.18
  Bottom Layer w0.7: pad.18 79.167,93.8 79.867,93.1 89.918,93.1 91.943,91.075 U5.15
  Bottom Layer w2: K4.5@70.702,98.2 pad.19
motor_1_in_A: U4.17 U5.1 | length 9.9
  Bottom Layer w0.3: 122.882,92.52 122.904,92.497 127.258,92.497 U4.17
  Bottom Layer w0.5: U5.1@117.402,92.52 122.882,92.52
motor_1_in_B: U4.16 U5.2 | length 9.7
  Bottom Layer w0.3: 123.466,91.753 123.538,91.825 U4.16
  Bottom Layer w0.5: U5.2 122.787,91.075 123.464,91.753
motor_2__A_relay: K2.5 pad.11 pad.13 U5.12 | length 46
  Top Layer w1: pad.13 91.702,66.1 91.702,86.8 pad.11
  Bottom Layer w0.7: pad.11 92.025,86.9 92.39,87.265 U5.12
  Bottom Layer w1: pad.13 91.743,66.2 pad.13@91.943,66 ; K2.5@94.24,66 94.34,65.9 K2.5@94.702,65.9 ; K2.5@94.702,66.35 K2.5@95.577,66.35
  Bottom Layer w2: pad.13@91.943,66 K2.5@94.24,66
motor_2__B_relay: K5.5 pad.9 pad.10 U5.11 | length 25.7
  Top Layer w0.7: pad.9 pad.10
  Bottom Layer w0.7: pad.10 109.825,85.5 110.32,85.995 U5.11
  Bottom Layer w1: pad.9 pad.9@109.627,65.925 ; K5.5@112.502,65.925 K5.5@112.527,65.95
  Bottom Layer w2: pad.9@109.627,65.925 K5.5@112.502,65.925
motor_2_in_A: U4.13 U5.5 | length 10.5
  Bottom Layer w0.3: 125.302,89.6 125.554,89.853 127.258,89.853 U4.13
  Bottom Layer w0.5: U5.5 122.967,87.265 125.302,89.6
motor_2_in_B: U4.12 U5.6 | length 10.7
  Bottom Layer w0.3: 125.502,88.6 126.104,89.203 127.258,89.203 U4.12
  Bottom Layer w0.5: U5.6 122.897,85.995 125.502,88.6
motor_3__A_relay: K3.5 pad.15 pad.16 U5.14 | length 86.8
  Top Layer w0.7: pad.16 56.052,66.55 56.052,92.05 pad.15
  Bottom Layer w0.7: pad.16@55.969,66.461 pad.16 pad.16@56.027,66.475 ; pad.15 88.902,92.1 91.202,89.8 91.207,89.805 U5.14 ; K3.5@59.752,66.475 K3.5@59.777,66.45
  Bottom Layer w2: pad.16@56.027,66.475 K3.5@59.752,66.475
motor_3__B_relay: K6.5 pad.14 pad.17 U5.13 | length 67.2
  Top Layer w1: pad.14 73.877,66.075 73.877,89.7
  Bottom Layer w0.7: pad.17@74.202,90.7 74.202,90.581 74.282,90.5 88.602,90.5 90.602,88.5
  Bottom Layer w1: K6.5@76.844,65.479 77.577,66.212 K6.5@77.577,66.45 ; 90.602,88.5 90.637,88.535 U5.13
  Bottom Layer w2: pad.14 K6.5@76.702,66
motor_3_in_A: U4.15 U5.3 | length 10
  Bottom Layer w0.3: 124.002,90.6 124.554,91.153 127.258,91.153 U4.15
  Bottom Layer w0.5: U5.3 123.207,89.805 124.002,90.6
motor_3_in_B: U4.14 U5.4 | length 10.3
  Bottom Layer w0.3: 124.591,90.058 124.591,90.142 124.951,90.503 127.258,90.503 U4.14
  Bottom Layer w0.5: U5.4 123.068,88.535 124.591,90.058
NetC5_1: C5.1 C17.2 R21.1 TSOP1.2 | length 15.6
  Bottom Layer w0.5: R21.1@141.602,102.3 C17.2
  Bottom Layer w0.7: R21.1@141.602,102.3 141.602,103.99 141.719,104.107 141.719,104.647 TSOP1.2 141.809,104.862 141.809,106.008 143.102,107.3 C5.1
NetD1_1: 
NetD1_2: 
NetD2_1: 
NetD3_1: 
NetD4_1: 
NetD5_1: 
NetD6_2: 
NetD7_2: 
NetD8_2: 
NetD9_2: D9.2 J2.1 | length 3.1
  Bottom Layer w1: D9.2 D9.2@131.442,72.26 ; D9.2@131.482,72.4 131.482,75.22 J2.1
NetD10_1: 
NetD11_1: D11.1 R13.1 | length 2.3
  Bottom Layer w0.3: D11.1@141.702,97.255 D11.1
  Bottom Layer w0.7: D11.1@141.702,97.255 142.327,96.63 R13.1
NetD12_1: D12.1 R14.1 | length 2.1
  Bottom Layer w0.3: D12.1@146.102,97.425 D12.1
  Bottom Layer w0.7: D12.1@146.096,97.424 D12.1 ; D12.1@146.102,97.425 146.827,96.7 R14.1
NetD13_1: D13.1 R15.1 | length 2
  Bottom Layer w0.3: R15.1@150.502,95.925 R15.1 R15.1@150.827,95.6
  Bottom Layer w0.7: R15.1@150.502,95.925 D13.1
NetD14_1: D14.1 R16.1 | length 3.7
  Bottom Layer w0.7: D14.1 154.955,97.277 156.445,97.277 156.702,97.02 156.702,95.675 R16.1@156.827,95.55
  Bottom Layer w1: R16.1 R16.1@156.827,95.55
NetD15_1: D15.1 R19.1 | length 3.2
  Bottom Layer w1: D15.1 145.867,70.904 145.867,69.859 147.227,68.5 R19.1
NetD16_1: D16.1 J3.2 K1.1 | length 13.7
  Bottom Layer w1: J3.2 77.282,106.9 D16.1@82.186,106.9
  Bottom Layer w2: J3.2 77.239,106.743 77.239,106.013 82.602,100.65 K1.1@82.602,100.4
NetD16_2: D16.2 D19.2 R20.1 | length 20.1
  Bottom Layer w1: D19.2@66.657,109.5 82.532,109.5 D16.2 86.207,109.57 86.502,109.275 R20.1
NetD17_1: D17.1 J4.2 K2.1 | length 15.3
  Bottom Layer w1: D17.1 99.787,57.785 106.377,57.785 J4.2@106.404,57.757
  Bottom Layer w2: K2.1@100.677,63.85 100.677,63.6 106.404,57.872 106.404,57.757 J4.2
NetD17_2: D17.2 D18.2 R22.1 | length 21.5
  Bottom Layer w1: D17.2 99.987,55.33 100.487,54.83 D18.2 117.524,54.852 120.979,54.852 R22.1@121.002,54.875
NetD18_1: D18.1 J4.1 K5.1 | length 15.7
  Bottom Layer w1: J4.1 111.742,57.5 117.332,57.5 D18.1@117.532,57.3
  Bottom Layer w2: J4.1 111.692,57.85 112.027,57.85 118.027,63.85 K5.1@118.527,63.85
NetD19_1: D19.1 J3.1 K4.1 | length 14.5
  Bottom Layer w1: D19.1@66.735,106.8 J3.1
  Bottom Layer w2: K4.1@65.602,100.7 65.602,100.95 71.302,106.65 71.952,106.65 J3.1
NetD20_1: D20.1 J5.2 K3.1 | length 14
  Bottom Layer w1: D20.1 65.097,57.566 70.227,57.566 J5.2
  Bottom Layer w2: K3.1@64.877,63.95 64.877,63.7 70.304,58.272 70.304,57.757 J5.2
NetD20_2: D20.2 D21.2 R23.1 | length 19.8
  Bottom Layer w1: D20.2 80.716,54.93 81.216,55.43 D21.2 81.557,55.375 R23.1@84.602,55.375
NetD21_1: D21.1 J5.1 K6.1 | length 14.7
  Bottom Layer w1: 76.851,57.874 81.406,57.874 D21.1
  Bottom Layer w2: J5.1 75.592,57.85 76.827,57.85 76.851,57.874 82.677,63.7 K6.1@82.677,63.95
NetD22_1: D22.1 J6.1 Q3.4 | length 10.9
  Bottom Layer w0.5: J6.1 101.69,103.63 D22.1
  Bottom Layer w1: J6.1 101.02,99.032 Q3.4
NetD22_2: D22.2 R24.2 | length 3
  Bottom Layer w0.5: D22.2@106.702,106.17 106.893,105.979 107.166,105.979 107.244,105.9 109.177,105.9 R24.2
NetD23_1: D23.1 J7.1 Q4.4 | length 11.3
  Bottom Layer w0.5: J7.1 117.95,103.63 D23.1
  Bottom Layer w1: Q4.4@117.052,98.888 117.08,98.916 117.08,103.63 J7.1
NetD23_2: D23.2 R25.2 | length 3.4
  Bottom Layer w0.5: R25.2 119.477,107 120.307,106.17 D23.2
NetGS1_2: GS1.2 Q2.3 | length 2.1
  Bottom Layer w0.5: GS1.2 GS1.2@130.352,86.75 ; Q2.3@130.352,84.75 Q2.3
  Bottom Layer w0.7: Q2.3@130.352,84.75 GS1.2@130.352,86.75
NetJ1_2: 
NetQ1_1: 
NetQ1_3: 
NetQ2_1: Q2.1 R18.2 | length 3.8
  Bottom Layer w0.7: Q2.1 133.402,82.7 133.809,83.107 133.809,83.832 R18.2
NetQ3_1: Q3.1 R9.2 | length 3.7
  Bottom Layer w0.5: R9.2@91.802,98.875 93.184,98.875 93.477,98.582 Q3.1@93.477,96.69
NetQ4_1: Q4.1 R10.2 | length 2.3
  Bottom Layer w0.5: Q4.1 Q4.1@124.407,101.88 ; R10.2@126.397,101.88 R10.2
  Bottom Layer w0.7: Q4.1@124.407,101.88 R10.2@126.397,101.88
NRST: C16.2 pad.8 R17.2 U4.6 | length 24.1
  Bottom Layer w0.3: R17.2 128.802,95.425 128.802,92.2 129.827,91.175 U4.6 138.877,91.175 139.702,92 C16.2@139.702,93
  Bottom Layer w0.7: R17.2 128.602,95.975 128.602,100.3 pad.8
OUT_1: pad.6 R10.1 U4.19 | length 8
  Bottom Layer w0.3: 125.702,94.1 126.004,93.797 127.258,93.797 U4.19 ; R10.1@126.402,99.925 R10.1
  Bottom Layer w0.5: 125.702,94.1 125.702,95.5 126.402,96.2 pad.6
  Bottom Layer w0.7: pad.6 R10.1@126.402,99.925
OUT_2: R9.1 U4.18 | length 38.1
  Bottom Layer w0.3: 124.792,93.6 125.267,93.125 U4.18
  Bottom Layer w0.5: R9.1 91.602,95.9 93.902,93.6 124.792,93.6
OUT_3: R18.1 U4.11 | length 7.9
  Bottom Layer w0.3: U4.11 130.927,88.575 133.202,86.3 133.677,86.3 R18.1
RX: TSOP1.3 U4.1 | length 11.5
  Bottom Layer w0.5: U4.1@133.575,94.6 133.575,96.773
  Bottom Layer w0.7: 133.575,96.773 136.102,99.3 136.102,103.99 136.792,104.68 TSOP1.3
S: 
VCC: C4.1 C11.2 C12.2 C13.2 pad.4 pad.5 R17.1 R21.2 S13.5 S13.6 S13.7 S13.8 U1.2 U1.4 U4.4 | length 60
  Top Layer w1: pad.5 143.102,91.9 143.102,86.8 pad.4
  Bottom Layer w0.3: C4.1 130.327,95.95 R17.1 130.177,92.673 130.352,92.497 133.1,92.497 U4.4 134.402,92.475 C11.2@134.902,92.975
  Bottom Layer w1: C11.2 135.052,93.15 135.052,94.75 136.844,96.542 pad.5@137.359,96.542 ; pad.5 137.702,100.5 139.327,102.125 139.352,102.125 139.427,102.2 R21.2 ; pad.4 S13.5 S13.6 ; U1.2@150.102,77.914 U1.4@150.102,82.642 ; S13.8 S13.7 S13.6 ; C12.2 C13.2 150.502,83.2 U1.4 149.942,82.96 S13.6
W: 
pads on no net: MH1.1 MH1.10 MH2.1 MH2.10 MH3.1 MH3.10 MH4.1 MH4.10 S12.1 S12.6 U4.2 U4.3 U4.20 U5.7 U5.10
copper on no net: | length 0.6
  Bottom Layer w0.3: 133.123,93.775 133.702,93.775

## Polygon pours and split planes (outlines as drawn)
no net on Top Layer "NONET_L01_P001" (solid, remove dead copper, pour order 1): 109.75,129
GND on Top Layer "GND_L01_P003" (solid, remove dead copper, pour order 3): 106.7,118.9

## Keep-outs
Keep-Out Layer:
  the board outline again, w0.254

## Silkscreen, mask and mechanical layers (free items; w line width, h text height)
Top Overlay:
  text "+" at 137.902,69.893 h2

## Text inside footprints (layer, text, board x,y; h text height)
C3: Top Overlay "+" at 146.6,67.2 h1.5
C4: Top Overlay "+" at 130.502,92.7 h1.5 r90
C5: Top Overlay "+" at 150.652,111.025 h1.5 r270
D11: Top Overlay "K" at 140.802,100.6 h0.51 r90
D12: Top Overlay "K" at 145.202,100.6 h0.51 r90
D13: Top Overlay "K" at 149.602,100.6 h0.51 r90
D14: Top Overlay "K" at 153.902,100.6 h0.51 r90
D15: Top Overlay "K" at 142.202,69.7 h0.51 r180
D16: Top Overlay "K" at 81.302,110.9 h0.51 r180
D17: Top Overlay "K" at 101.202,54.6 h0.51 r180
D18: Top Overlay "K" at 119.202,54.1 h0.51 r180
D19: Top Overlay "K" at 64.702,111 h0.51 r180
D20: Top Overlay "K" at 66.802,54.2 h0.51 r180
D21: Top Overlay "K" at 83.002,54.5 h0.51 r180
D22: Top Overlay "K" at 104.902,107.7 h0.51 r180
D23: Top Overlay "K" at 121.302,108 h0.51 r180
S13: Top Overlay "ON" at 154.312,87 h0.8; Top Overlay "1" at 154.712,91.6 h0.7 r270; Top Overlay "2" at 152.112,91.8 h0.7 r270; Top Overlay "3" at 149.512,91.8 h0.7 r270; Top Overlay "4" at 147.012,91.8 h0.7 r270
U4: Mechanical 7 "0.03in/0.762mm" at 135.345,85.15 h0.64; Mechanical 7 "0.026in/0.65mm" at 140.616,93.783 h0.64; Mechanical 7 "0.26in/6.604mm" at 124.918,91.183 h0.64; Mechanical 7 "0.26in/6.604mm" at 132.424,99.12 h0.64; Mechanical 7 "0.176in/4.47mm" at 132.424,97.215 h0.64; Mechanical 7 "Alt 2 Padstyle: OX90Y60D30P" at 138.774,75.498 h1.27; Mechanical 7 "Alt 1 Padstyle: OX60Y90D30P" at 138.774,77.022 h1.27; Mechanical 7 "Pin One Padstyle: RX58Y14D0T" at 139.092,81.594 h1.27; Mechanical 7 "Default Padstyle: RX58Y14D0T" at 139.092,83.118 h1.27; Bottom Overlay "*" at 133.694,94.654 h1.27; Mechanical 13 "*" at 132.373,93.456 h1.27